# EAGLE board touch_glove_bullshit (EAGLE 7.7.0), part 1 of 2
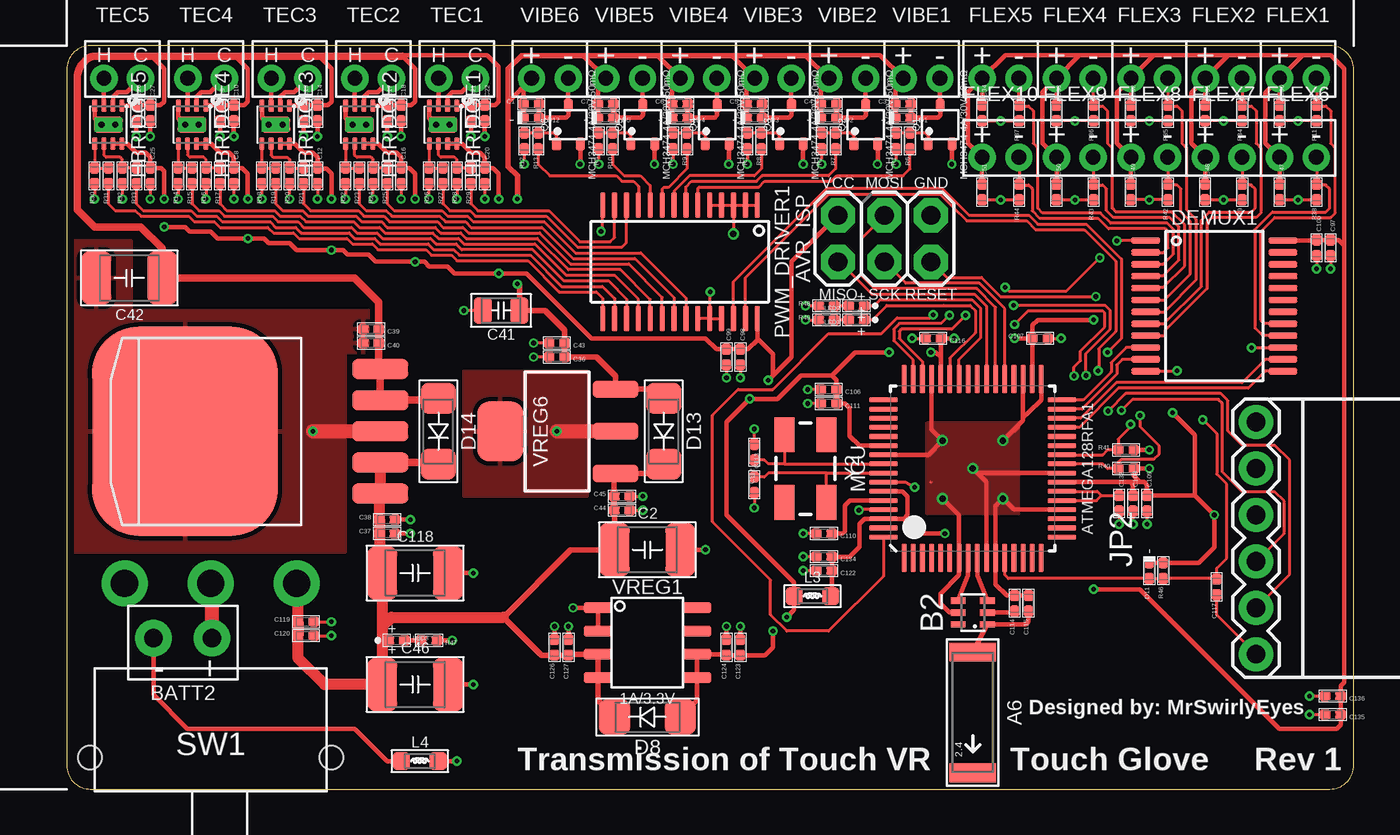
[diagram p0: board, top side]
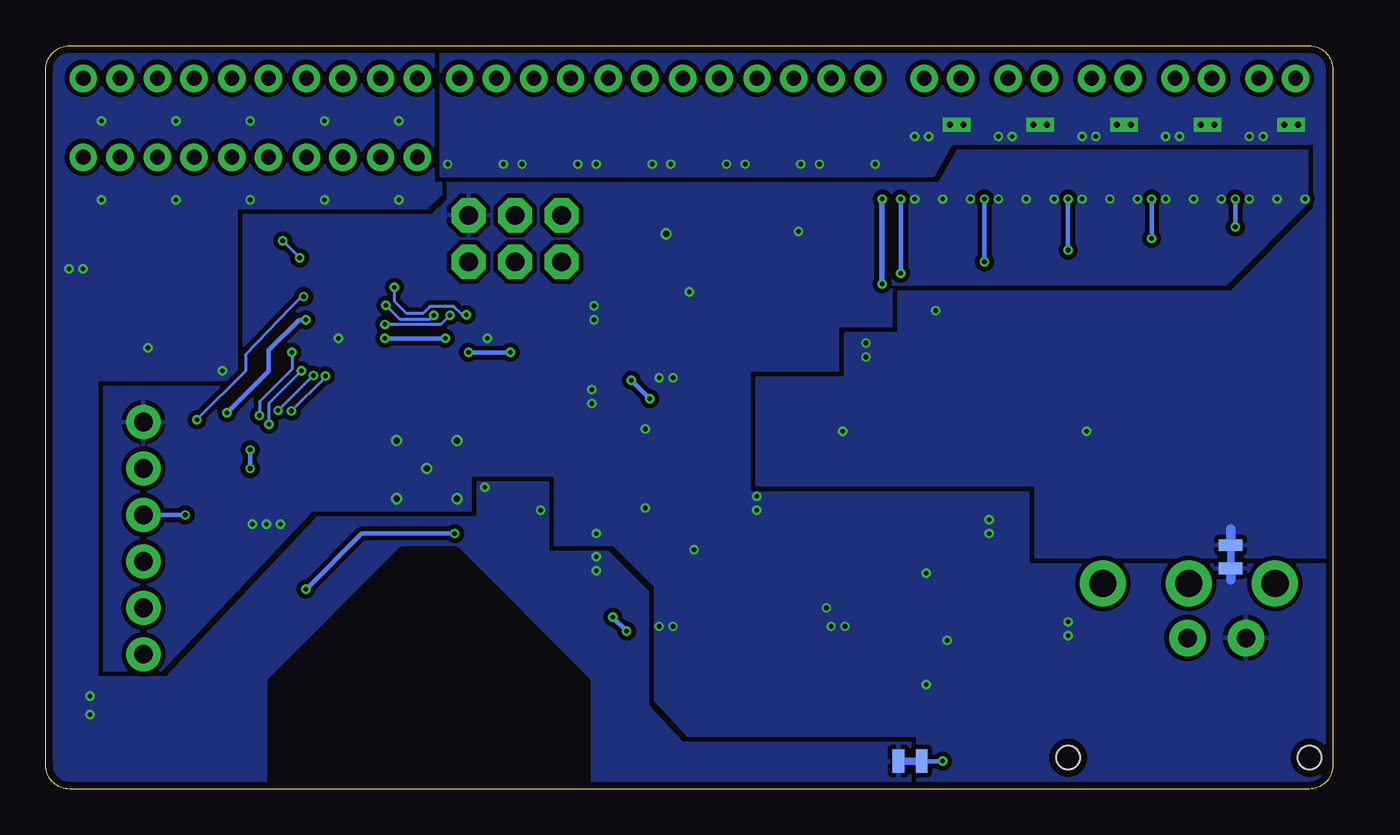
[diagram p1: board, bottom side, seen from below]

Size 70.36 x 40.64 mm. Coordinates in mm from the lower left corner, seen from the top.
Outline: 69.06,40.64 1.3,40.64 arc90 0,39.34 0,1.3 arc90 1.3,0 69.06,0 arc90 70.36,1.3 70.36,39.34 arc90 69.06,40.64
Copper layers (1*16): Top 0.035559375mm / dielectric 1.6mm / Bottom 0.035559375mm
Design rules "oshpark-2layer": minimum track width 6mil, minimum drill 10mil, track to track 6mil, track to pad 6mil, pad to pad 6mil, via to via 6mil, smd to smd 6mil, copper to edge 15mil, drill to drill 6mil, minimum pad ring 5mil, minimum via ring 5mil, stop-mask expansion 2.5mil, vias tented up to drill 0mil, thermal gap 10mil
bRestrict: area 40.9,0.5 to 57.9,13

## Footprints (pad centres in the part's own frame; a part is rotated, then mirrored left to right if it is on the bottom)
ANTENNA-CHIP5 = smd 1.016 x 2.54: FEED -3.302,0; NC 3.302,0
2PT_GND_TIE = smd 0.635 x 1.27: P$1 -0.635,0; P$2 0.635,0
2X3-NS = drill 1.016 pad 1.88 octagon: 1 -2.54,-1.27; 2 -2.54,1.27; 3 0,-1.27; 4 0,1.27; 5 2.54,-1.27; 6 2.54,1.27
0805_BALUN = smd 0.35 x 0.8: 1 -0.65,-0.8; 2 0,-0.8; 3 0.65,-0.8; 4 0.65,0.8; 5 0,0.8; 6 -0.65,0.8
DUAL_PTH_PADS = drill 1 pad 2: + -1.6,0; - 1.6,0
_CER_SMD_0402 = smd 0.6 x 0.55: 1 -0.425,0; 2 0.425,0
_CER_SMD-1210 = smd 1.65 x 2.9: 1 -1.8,0; 2 1.8,0
_CER_SMD-805 = smd 1 x 1.45: 1 -1,0; 2 1,0
SOD-923F/0402 = smd 0.6 x 0.55: A -0.425,0; K 0.425,0
SOD123F = smd 1.7 x 1.9: A -1.8,0; K 1.8,0
SSOP-24 = smd 1.6 x 0.35: 1 -3.75,3.575; 2 -3.75,2.925; 3 -3.75,2.275; 4 -3.75,1.625; 5 -3.75,0.975; 6 -3.75,0.325; 7 -3.75,-0.325; 8 -3.75,-0.975; 9 -3.75,-1.625; 10 -3.75,-2.275; 11 -3.75,-2.925; 12 -3.75,-3.575; 13 3.75,-3.575; 14 3.75,-2.925; 15 3.75,-2.275; 16 3.75,-1.625; 17 3.75,-0.975; 18 3.75,-0.325; 19 3.75,0.325; 20 3.75,0.975; 21 3.75,1.625; 22 3.75,2.275; 23 3.75,2.925; 24 3.75,3.575
CONNECTOR_FSR = drill 0.8 pad 1.5: + -1,-1.27; - 1,-1.27
WSON-8-PPAD = smd 0.7 x 0.28: 1 -1.035,0.75; 2 -1.035,0.25; 3 -1.035,-0.25; 4 -1.035,-0.75; 5 1.035,-0.75; 6 1.035,-0.25; 7 1.035,0.25; 8 1.035,0.75 | smd 0.9 x 1.6: GND 0,0 | drill 0.33 pad 0.75 square: P$1 0,-0.38; P$2 0,0.37
FTDI_BASIC-6PIN-MALE-RA = drill 1.016 pad 1.88: CTS 10.16,0; DTR 0,0; GND 12.7,0; RXI 2.54,0; TXO 5.08,0; VCC 7.62,0
_SMD-0603 = smd 0.95 x 1: 1 -1,0; 2 1,0
LED_SMD-0402 = smd 0.6 x 0.55: A -0.425,0; K 0.425,0
VFQFN-64 = smd 1.562 x 0.28: 1 -4.881,3.75; 2 -4.881,3.25; 3 -4.881,2.75; 4 -4.881,2.25; 5 -4.881,1.75; 6 -4.881,1.25; 7 -4.881,0.75; 8 -4.881,0.25; 9 -4.881,-0.25; 10 -4.881,-0.75; 11 -4.881,-1.25; 12 -4.881,-1.75; 13 -4.881,-2.25; 14 -4.881,-2.75; 15 -4.881,-3.25; 16 -4.881,-3.75; 33 4.881,-3.75; 34 4.881,-3.25; 35 4.881,-2.75; 36 4.881,-2.25; 37 4.881,-1.75; 38 4.881,-1.25; 39 4.881,-0.75; 40 4.881,-0.25; 41 4.881,0.25; 42 4.881,0.75; 43 4.881,1.25; 44 4.881,1.75; 45 4.881,2.25; 46 4.881,2.75; 47 4.881,3.25; 48 4.881,3.75 | smd 0.28 x 1.562: 17 -3.75,-4.881; 18 -3.25,-4.881; 19 -2.75,-4.881; 20 -2.25,-4.881; 21 -1.75,-4.881; 22 -1.25,-4.881; 23 -0.75,-4.881; 24 -0.25,-4.881; 25 0.25,-4.881; 26 0.75,-4.881; 27 1.25,-4.881; 28 1.75,-4.881; 29 2.25,-4.881; 30 2.75,-4.881; 31 3.25,-4.881; 32 3.75,-4.881; 49 3.75,4.881; 50 3.25,4.881; 51 2.75,4.881; 52 2.25,4.881; 53 1.75,4.881; 54 1.25,4.881; 55 0.75,4.881; 56 0.25,4.881; 57 -0.25,4.881; 58 -0.75,4.881; 59 -1.25,4.881; 60 -1.75,4.881; 61 -2.25,4.881; 62 -2.75,4.881; 63 -3.25,4.881; 64 -3.75,4.881
TSSOP-28 = smd 1.4 x 0.3: 1 -3.1,4.225; 2 -3.1,3.575; 3 -3.1,2.925; 4 -3.1,2.275; 5 -3.1,1.625; 6 -3.1,0.975; 7 -3.1,0.325; 8 -3.1,-0.325; 9 -3.1,-0.975; 10 -3.1,-1.625; 11 -3.1,-2.275; 12 -3.1,-2.925; 13 -3.1,-3.575; 14 -3.1,-4.225; 15 3.1,-4.225; 16 3.1,-3.575; 17 3.1,-2.925; 18 3.1,-2.275; 19 3.1,-1.625; 20 3.1,-0.975; 21 3.1,-0.325; 22 3.1,0.325; 23 3.1,0.975; 24 3.1,1.625; 25 3.1,2.275; 26 3.1,2.925; 27 3.1,3.575; 28 3.1,4.225
SC-70FL/MCPH3 = smd 0.5 x 0.7: 1 -0.65,-1.05; 2 0.65,-1.05; 3 0,1.05
RESISTOR_SMD-0402 = smd 0.6 x 0.55: 1 -0.425,0; 2 0.425,0
SW_SLIDE_RA_SPDT_4A-28V_L12.7-W9.5 = drill 1.5 pad 2.5: P 0,-4.765; S1 -4.7,-4.765; S2 4.7,-4.765 | hole 1.3: -6.605,4.765; 6.605,4.765
CONNECTOR_PELTIER = drill 0.8 pad 1.5: COLD 1,-1.27; HOT -1,-1.27
CONNECTOR_VIBE-MOTOR = drill 0.8 pad 1.5: 1 -1,-1.27; 2 1,-1.27
SOIC-8_W3.9MM = smd 1.55 x 0.6: 1 -2.7,1.905; 2 -2.7,0.635; 3 -2.7,-0.635; 4 -2.7,-1.905; 5 2.7,-1.905; 6 2.7,-0.635; 7 2.7,0.635; 8 2.7,1.905
SOT223-4 = smd 0.95 x 2.5: 1 -2.3,-3.199; 2 0,-3.199; 3 2.3,-3.199 | smd 3.25 x 2.5: TAB 0,3.099
DDPAK-5 = smd 1.067 x 3.048: 1 -3.404,-8.763; 2 -1.702,-8.763; 3 0,-8.763; 4 1.702,-8.763; 5 3.404,-8.763 | smd 11.43 x 10.16: TAB 0,1.905
CRYSTAL-SMD-5X3 = smd 1.9 x 1.1: 1 -1.85,-1.15; 2 1.85,-1.15; 3 1.85,1.15; 4 -1.85,1.15

## Placement (x,y rotation side)
A6  2.4GHz/802.11/0.5dBi/3W  [ANTENNA-CHIP5]  49.53,4.19 270 top
ANALOG_BR  2PT_GND_TIE  [2PT_GND_TIE]  23.11,1.52 180 bottom
AVR_ISP  AVR ISP  [2X3-NS]  44.7,30.1 0 top
B2  Impedence UNBAL/BAL (50Ω/100Ω)  [0805_BALUN]  49.53,9.65 90 top
BATT2  BATTERYPTH_HOLES  [DUAL_PTH_PADS]  6.35,8.26 180 top
C1  0.1uF/50V  [_CER_SMD_0402]  25.4,37.47 0 top
C2  100uF/16V  [_CER_SMD-1210]  31.75,13.08 0 top
C3  0.1uF/50V  [_CER_SMD_0402]  45.72,37.47 0 top
C4  0.1uF/50V  [_CER_SMD_0402]  41.66,37.47 0 top
C5  0.1uF/50V  [_CER_SMD_0402]  37.59,37.47 0 top
C6  0.1uF/50V  [_CER_SMD_0402]  33.53,37.47 0 top
C7  0.1uF/50V  [_CER_SMD_0402]  29.46,37.47 0 top
C8  0.1uF/50V  [_CER_SMD_0402]  9.14,33.53 270 top
C9  0.1uF/50V  [_CER_SMD_0402]  8.38,36.96 270 top
C10  10uF/10V  [_CER_SMD_0402]  9.14,36.96 270 top
C12  0.1uF/50V  [_CER_SMD_0402]  13.72,33.53 270 top
C13  0.1uF/50V  [_CER_SMD_0402]  12.95,36.96 270 top
C14  10uF/10V  [_CER_SMD_0402]  13.72,36.96 270 top
C16  0.1uF/50V  [_CER_SMD_0402]  18.29,33.53 270 top
C17  0.1uF/50V  [_CER_SMD_0402]  17.53,36.96 270 top
C18  10uF/10V  [_CER_SMD_0402]  18.29,36.96 270 top
C20  0.1uF/50V  [_CER_SMD_0402]  22.86,33.53 270 top
C21  0.1uF/50V  [_CER_SMD_0402]  22.1,36.96 270 top
C22  10uF/10V  [_CER_SMD_0402]  22.86,36.96 270 top
C25  0.1uF/50V  [_CER_SMD_0402]  4.57,33.53 270 top
C26  0.1uF/50V  [_CER_SMD_0402]  3.81,36.96 270 top
C27  10uF/10V  [_CER_SMD_0402]  4.57,36.96 270 top
C30  0.1uF/50V  [_CER_SMD_0402]  66.29,36.96 270 top
C31  0.1uF/50V  [_CER_SMD_0402]  62.23,36.96 270 top
C32  0.1uF/50V  [_CER_SMD_0402]  58.17,36.96 270 top
C33  0.1uF/50V  [_CER_SMD_0402]  54.1,36.96 270 top
C34  0.1uF/50V  [_CER_SMD_0402]  50.04,36.96 270 top
C36  0.1uF/50V  [_CER_SMD_0402]  26.8,23.62 180 top
C37  10uF/10V  [_CER_SMD_0402]  17.53,13.97 0 top
C38  0.1uF/50V  [_CER_SMD_0402]  17.53,14.73 0 top
C39  10uF/10V  [_CER_SMD_0402]  16.64,25.15 180 top
C40  0.1uF/50V  [_CER_SMD_0402]  16.64,24.38 180 top
C41  47uF/10V  [_CER_SMD-805]  23.75,26.16 180 top
C42  100uF/16V  [_CER_SMD-1210]  3.43,27.94 180 top
C43  10uF/10V  [_CER_SMD_0402]  26.8,24.38 180 top
C44  10uF/10V  [_CER_SMD_0402]  30.35,15.24 0 top
C45  0.1uF/50V  [_CER_SMD_0402]  30.35,16 0 top
C46  100uF/16V  [_CER_SMD-1210]  19.05,5.71 0 top
C47  0.1uF/50V  [_CER_SMD_0402]  66.29,32.64 270 top
C48  0.1uF/50V  [_CER_SMD_0402]  62.23,32.64 270 top
C49  0.1uF/50V  [_CER_SMD_0402]  58.17,32.64 270 top
C50  0.1uF/50V  [_CER_SMD_0402]  54.1,32.64 270 top
C51  0.1uF/50V  [_CER_SMD_0402]  50.04,32.64 270 top
C97  10uF/10V  [_CER_SMD_0402]  69.09,29.59 270 top
C98  0.1uF/50V  [_CER_SMD_0402]  36.83,23.62 270 top
C99  10uF/10V  [_CER_SMD_0402]  36.07,23.62 270 top
C100  0.1uF/50V  [_CER_SMD_0402]  68.33,29.59 270 top
C106  0.1uF/50V  [_CER_SMD_0402]  41.66,21.84 180 top
C107  1uF/25V  [_CER_SMD_0402]  53.21,24.64 0 top
C108  0.1uF/50V  [_CER_SMD_0402]  58.29,15.62 270 top
C109  1uF/25V  [_CER_SMD_0402]  59.05,15.62 270 top
C110  1uF/25V  [_CER_SMD_0402]  41.4,13.97 180 top
C111  1uF/25V  [_CER_SMD_0402]  41.66,21.08 180 top
C112  12pF/100V  [_CER_SMD_0402]  37.59,18.41 90 top
C113  12pF/100V  [_CER_SMD_0402]  37.59,16.64 270 top
C114  22pF/50V  [_CER_SMD_0402]  51.82,10.16 90 top
C115  0.75pF/50V  [_CER_SMD_0402]  52.58,10.16 90 top
C116  0.1uF/50V  [_CER_SMD_0402]  47.37,24.64 180 top
C117  0.1uF/50V  [_CER_SMD_0402]  62.87,11.05 90 top
C118  100uF/16V  [_CER_SMD-1210]  19.05,11.81 0 top
C119  0.1uF/50V  [_CER_SMD_0402]  13.08,9.14 0 top
C120  10uF/10V  [_CER_SMD_0402]  13.08,8.38 0 top
C122  0.1uF/50V  [_CER_SMD_0402]  41.4,11.94 180 top
C123  10uF/10V  [_CER_SMD_0402]  36.83,7.75 90 top
C124  0.1uF/50V  [_CER_SMD_0402]  36.07,7.75 90 top
C126  10uF/10V  [_CER_SMD_0402]  26.67,7.75 90 top
C127  0.1uF/50V  [_CER_SMD_0402]  27.43,7.75 90 top
C132  1uF/25V  [_CER_SMD_0402]  57.53,15.62 270 top
C134  1uF/25V  [_CER_SMD_0402]  41.4,12.7 180 top
C135  0.1uF/50V  [_CER_SMD_0402]  69.22,4.06 180 top
C136  1uF/25V  [_CER_SMD_0402]  69.22,5.08 180 top
D1  150mA/75V  [SOD-923F/0402]  45.72,36.7 180 top
D2  150mA/75V  [SOD-923F/0402]  41.66,36.7 180 top
D3  150mA/75V  [SOD-923F/0402]  37.59,36.7 180 top
D4  150mA/75V  [SOD-923F/0402]  33.53,36.7 180 top
D5  150mA/75V  [SOD-923F/0402]  29.46,36.7 180 top
D8  1A/50V  [SOD123F]  31.75,3.94 180 top
D11  150mA/75V  [SOD-923F/0402]  59.18,11.94 90 top
D12  150mA/75V  [SOD-923F/0402]  25.4,36.7 180 top
D13  1A/50V  [SOD123F]  32.64,19.56 270 top
D14  1A/50V  [SOD123F]  20.32,19.56 270 top
DEMUX1  CH16_MUX-DEMUX  [SSOP-24]  62.74,26.42 0 top
FLEX1  10K  [CONNECTOR_FSR]  67.31,40.13 0 top
FLEX2  10K  [CONNECTOR_FSR]  63.25,40.13 0 top
FLEX3  10K  [CONNECTOR_FSR]  59.18,40.13 0 top
FLEX4  10K  [CONNECTOR_FSR]  55.12,40.13 0 top
FLEX5  10K  [CONNECTOR_FSR]  51.05,40.13 0 top
FLEX6  10K  [CONNECTOR_FSR]  67.31,35.81 0 top
FLEX7  10K  [CONNECTOR_FSR]  63.25,35.81 0 top
FLEX8  10K  [CONNECTOR_FSR]  59.18,35.81 0 top
FLEX9  10K  [CONNECTOR_FSR]  55.12,35.81 0 top
FLEX10  10K  [CONNECTOR_FSR]  51.05,35.81 0 top
HBRIDGE1  DRV8837C  [WSON-8-PPAD]  20.57,36.32 270 top
HBRIDGE2  DRV8837C  [WSON-8-PPAD]  16,36.32 270 top
HBRIDGE3  DRV8837C  [WSON-8-PPAD]  11.43,36.32 270 top
HBRIDGE4  DRV8837C  [WSON-8-PPAD]  6.86,36.32 270 top
HBRIDGE5  DRV8837C  [WSON-8-PPAD]  2.29,36.32 270 top
JP2  FTDIPTH-RA  [FTDI_BASIC-6PIN-MALE-RA]  65.02,7.37 90 top
L3  10uH/0.38A  [_SMD-0603]  40.77,10.54 0 top
L4  10uH/0.38A  [_SMD-0603]  19.3,1.52 0 top
LED1  GREEN  [LED_SMD-0402]  43.18,25.65 180 top
LED2  RED  [LED_SMD-0402]  43.18,26.42 180 top
LED3  BLUE  [LED_SMD-0402]  18.03,8.13 0 top
MCU  ATMEGA128RFA1  [VFQFN-64]  49.53,17.53 90 top
NOISE_BR  2PT_GND_TIE  [2PT_GND_TIE]  5.59,12.7 270 bottom
PWM_DRIVER1  PCA9685  [TSSOP-28]  33.53,28.83 270 top
Q1  MCH3474 4A/30V/50mΩ  [SC-70FL/MCPH3]  47.75,36.32 0 top
Q2  MCH3474 4A/30V/50mΩ  [SC-70FL/MCPH3]  43.69,36.32 0 top
Q3  MCH3474 4A/30V/50mΩ  [SC-70FL/MCPH3]  39.62,36.32 0 top
Q4  MCH3474 4A/30V/50mΩ  [SC-70FL/MCPH3]  35.56,36.32 0 top
Q5  MCH3474 4A/30V/50mΩ  [SC-70FL/MCPH3]  31.5,36.32 0 top
Q6  MCH3474 4A/30V/50mΩ  [SC-70FL/MCPH3]  27.43,36.32 0 top
R1  10KΩ  [RESISTOR_SMD-0402]  45.34,35.43 90 top
R2  10KΩ  [RESISTOR_SMD-0402]  41.27,35.43 90 top
R3  10KΩ  [RESISTOR_SMD-0402]  37.21,35.43 90 top
R4  10KΩ  [RESISTOR_SMD-0402]  33.15,35.43 90 top
R5  10KΩ  [RESISTOR_SMD-0402]  29.08,35.43 90 top
R6  100Ω  [RESISTOR_SMD-0402]  46.1,35.43 90 top
R7  100Ω  [RESISTOR_SMD-0402]  42.04,35.43 90 top
R8  100Ω  [RESISTOR_SMD-0402]  37.97,35.43 90 top
R9  100Ω  [RESISTOR_SMD-0402]  33.91,35.43 90 top
R10  100Ω  [RESISTOR_SMD-0402]  29.84,35.43 90 top
R11  47KΩ  [RESISTOR_SMD-0402]  68.33,36.96 90 top
R12  10KΩ  [RESISTOR_SMD-0402]  25.02,35.43 90 top
R13  100Ω  [RESISTOR_SMD-0402]  25.78,35.43 90 top
R14  10KΩ  [RESISTOR_SMD-0402]  6.1,33.53 90 top
R15  100Ω  [RESISTOR_SMD-0402]  6.86,33.53 90 top
R16  10KΩ  [RESISTOR_SMD-0402]  7.62,33.53 90 top
R17  100Ω  [RESISTOR_SMD-0402]  8.38,33.53 90 top
R18  10KΩ  [RESISTOR_SMD-0402]  10.67,33.53 90 top
R19  100Ω  [RESISTOR_SMD-0402]  11.43,33.53 90 top
R20  10KΩ  [RESISTOR_SMD-0402]  12.19,33.53 90 top
R21  100Ω  [RESISTOR_SMD-0402]  12.95,33.53 90 top
R22  10KΩ  [RESISTOR_SMD-0402]  15.24,33.53 90 top
R23  100Ω  [RESISTOR_SMD-0402]  16,33.53 90 top
R24  10KΩ  [RESISTOR_SMD-0402]  16.76,33.53 90 top
R25  100Ω  [RESISTOR_SMD-0402]  17.53,33.53 90 top
R26  10KΩ  [RESISTOR_SMD-0402]  19.81,33.53 90 top
R27  100Ω  [RESISTOR_SMD-0402]  20.57,33.53 90 top
R28  10KΩ  [RESISTOR_SMD-0402]  21.34,33.53 90 top
R29  100Ω  [RESISTOR_SMD-0402]  22.1,33.53 90 top
R30  10KΩ  [RESISTOR_SMD-0402]  1.52,33.53 90 top
R31  100Ω  [RESISTOR_SMD-0402]  2.29,33.53 90 top
R32  10KΩ  [RESISTOR_SMD-0402]  3.05,33.53 90 top
R33  100Ω  [RESISTOR_SMD-0402]  3.81,33.53 90 top
R34  47KΩ  [RESISTOR_SMD-0402]  64.26,36.96 90 top
R35  47KΩ  [RESISTOR_SMD-0402]  60.2,36.96 90 top
R36  47KΩ  [RESISTOR_SMD-0402]  56.13,36.96 90 top
R37  47KΩ  [RESISTOR_SMD-0402]  52.07,36.96 90 top
R38  47KΩ  [RESISTOR_SMD-0402]  68.33,32.64 90 top
R39  47KΩ  [RESISTOR_SMD-0402]  64.26,32.64 90 top
R40  4.7KΩ  [RESISTOR_SMD-0402]  57.91,17.53 0 top
R41  4.7KΩ  [RESISTOR_SMD-0402]  57.91,18.54 0 top
R42  47KΩ  [RESISTOR_SMD-0402]  60.2,32.64 90 top
R43  47KΩ  [RESISTOR_SMD-0402]  56.13,32.64 90 top
R44  47KΩ  [RESISTOR_SMD-0402]  52.07,32.64 90 top
R46  10KΩ  [RESISTOR_SMD-0402]  59.94,11.94 90 top
R47  10KΩ  [RESISTOR_SMD-0402]  19.81,8.13 180 top
R48  2KΩ  [RESISTOR_SMD-0402]  41.53,26.42 0 top
R49  1KΩ  [RESISTOR_SMD-0402]  41.53,25.65 0 top
SW1  4A/28V  [SW_SLIDE_RA_SPDT_4A-28V_L12.7-W9.5]  7.87,6.48 180 top
TEC1  PELTIER  [CONNECTOR_PELTIER]  21.34,40.13 0 top
TEC2  PELTIER  [CONNECTOR_PELTIER]  16.76,40.13 0 top
TEC3  PELTIER  [CONNECTOR_PELTIER]  12.19,40.13 0 top
TEC4  PELTIER  [CONNECTOR_PELTIER]  7.62,40.13 0 top
TEC5  PELTIER  [CONNECTOR_PELTIER]  3.05,40.13 0 top
VIBE1  VIBE_MOTOR  [CONNECTOR_VIBE-MOTOR]  46.74,40.13 0 top
VIBE2  VIBE_MOTOR  [CONNECTOR_VIBE-MOTOR]  42.67,40.13 0 top
VIBE3  VIBE_MOTOR  [CONNECTOR_VIBE-MOTOR]  38.61,40.13 0 top
VIBE4  VIBE_MOTOR  [CONNECTOR_VIBE-MOTOR]  34.54,40.13 0 top
VIBE5  VIBE_MOTOR  [CONNECTOR_VIBE-MOTOR]  30.48,40.13 0 top
VIBE6  VIBE_MOTOR  [CONNECTOR_VIBE-MOTOR]  26.42,40.13 0 top
VREG1  1A/3.3V  [SOIC-8_W3.9MM]  31.75,8 0 top
VREG6  TL1963A-33 1.5A/3.3V  [SOT223-4]  26.8,19.56 90 top
VREG7  3A/1.8V  [DDPAK-5]  8.38,19.56 90 top
Y2  16MHz  [CRYSTAL-SMD-5X3]  40.39,17.53 270 top

## Library data of the parts
A6 = PiB_radio_frequency; CREATOR: Kenmei; DATASHEET: http://www.linxtechnologies.com/resources/data-guides/ant-xxx-chp-x.pdf; DIST: Digikey; DISTLINK: https://www.digikey.com/products/en?keywords=ANT-2.45-CHPCT-ND; DISTPN: ANT-2.45-CHPCT-ND; MFR: Linx Technologies Inc.; MPN: ANT-2.45-CHP-T
ANALOG_BR NOISE_BR = PiB_power_symbols
AVR_ISP = PiB_connectors; DATASHEET: http://portal.fciconnect.com/Comergent//fci/drawing/67996.pdf; DIST: Digikey; DISTLINK: https://www.digikey.com/products/en?keywords=609-3234-ND; DISTPN: 609-3234-ND; MFR: Amphenol FCI; MPN: 67997-206HLF
B2 = PiB_radio_frequency; CREATOR: Kenmei; DATASHEET: http://katalog.we-online.de/pbs/datasheet/748421245.pdf; DIST: Digikey; DISTLINK: https://www.digikey.com/products/en?keywords=732-2230-6-ND; DISTPN: 732-2230-6-ND; MFR: Wurth Electronics Inc; MPN: 748421245
BATT2 = PiB
C1 C3-C9 C12 C13 C16 C17 C20 C21 C25 C26 C30-C34 C36 C38 C40 C45 C47-C51 C98 C100 C106 C108 C116 C117 C119 C122 C124 C127 C135 = PiB_capacitors; CREATOR: MrSwirlyEyes; DIST: Digikey; DISTLINK: https://www.digikey.com/products/en?keywords=490-11917-1-ND; DISTPN: 490-11917-1-ND; MFR: Murata Electronics North America; MPN: GRM155R61H104KE19D
C2 C42 C46 C118 = PiB_capacitors; CREATOR: MrSwirlyEyes; DATASHEET: http://www.yuden.co.jp/productdata/catalog/en/mlcc01_e.pdf; DIST: Digikey; DISTLINK: https://www.digikey.com/products/en?keywords=587-3152-1-ND; DISTPN: 587-3152-1-ND; MFR: Taiyo Yuden; MPN: EMK325ABJ107MM-T
C10 C14 C18 C22 C27 C37 C39 C43 C44 C97 C99 C120 C123 C126 = PiB_capacitors; CREATOR: MrSwirlyEyes; DATASHEET: http://www.samsungsem.com/kr/support/product-search/mlcc/__icsFiles/afieldfile/2017/07/28/S_CL05A106MP5NUNC.pdf; DIST: Digikey; DISTLINK: https://www.digikey.com/products/en?keywords=1276-1450-1-ND; DISTPN: 1276-1450-1-ND; MFR: Samsung Electro-Mechanics; MPN: CL05A106MP5NUNC
C41 = PiB_capacitors; CREATOR: MrSwirlyEyes; DATASHEET: http://search.murata.co.jp/Ceramy/image/img/A01X/G101/ENG/GRM21BR61A476ME15-01.pdf; DIST: Digikey; DISTLINK: https://www.digikey.com/products/en?keywords=490-9961-1-ND; DISTPN: 490-9961-1-ND; MFR: Murata Electronics North America; MPN: GRM21BR61A476ME15L
C107 C109-C111 C132 C134 C136 = PiB_capacitors; CREATOR: MrSwirlyEyes; DATASHEET: http://search.murata.co.jp/Ceramy/image/img/A01X/G101/ENG/GRM155C81E105KE11-01.pdf; DIST: Digikey; DISTLINK: https://www.digikey.com/products/en?keywords=490-10014-1-ND; DISTPN: 490-10014-1-ND; MFR: Murata Electronics North America; MPN: GRM155C81E105KE11D
C112 C113 = PiB_capacitors; CREATOR: MrSwirlyEyes; DATASHEET: http://search.murata.co.jp/Ceramy/image/img/A01X/G101/ENG/GRM1555C2A120JA01-01.pdf; DIST: Digikey; DISTLINK: https://www.digikey.com/products/en?keywords=490-7300-1-ND; DISTPN: 490-7300-1-ND; MFR: Murata Electronics North America; MPN: GRM1555C2A120JA01D
C114 = PiB_capacitors; CREATOR: MrSwirlyEyes; DATASHEET: http://search.murata.co.jp/Ceramy/image/img/A01X/G101/ENG/GRM1555C1H220JA01-01.pdf; DIST: Digikey; DISTLINK: https://www.digikey.com/products/en?keywords=490-5868-1-ND; DISTPN: 490-5868-1-ND; MFR: Murata Electronics North America; MPN: GRM1555C1H220JA01D
C115 = PiB_capacitors; CREATOR: MrSwirlyEyes; DATASHEET: https://www.murata.com/~/media/webrenewal/support/library/catalog/products/capacitor/mlcc/c02e.ashx?la=en-us; DIST: Digikey; DISTLINK: https://www.digikey.com/products/en?keywords=490-5960-1-ND; DISTPN: 490-5960-1-ND; MFR: Murata Electronics North America; MPN: GRM1555C1HR75CA01D
D1-D5 D11 D12 = PiB_discrete_semiconductors; CREATOR: MrSwirlyEyes; DATASHEET: http://www.comchiptech.com/cms/UserFiles/CDSQR4148-HF-RevC213424.pdf; DIST: Digikey; DISTLINK: https://www.digikey.com/products/en?keywords=641-1677-1-ND; DISTPN: 641-1677-1-ND; MFR: Comchip Technology; MPN: CDSQR4148-HF
D8 D13 D14 = PiB_discrete_semiconductors; CREATOR: MrSwirlyEyes; DATASHEET: http://www.comchiptech.com/cms/UserFiles/CGRKM4001-HF%20Thru.%20CGRKM4007-HF%20RevG.pdf; DIST: Digikey; DISTLINK: https://www.digikey.com/products/en?keywords=641-1511-1-ND; DISTPN: 641-1511-1-ND; MFR: Comchip Technology; MPN: CGRKM4001-HF; TESTED: NO
DEMUX1 = PiB; CREATOR: MrSwirlyEyes; DATASHEET: http://www.ti.com/lit/ds/symlink/cd74hc4067.pdf; DIST: Digikey; DISTLINK: https://www.digikey.com/products/en?keywords=296-9226-1-ND; DISTPN: 296-9226-1-ND; MFR: Texas Instruments; MPN: CD74HC4067SM96; TESTED: NO
FLEX1-FLEX10 = PiB; CREATOR: MrSwirlyEyes; DATASHEET: https://cdn.sparkfun.com/datasheets/Sensors/ForceFlex/FLEX%20SENSOR%20DATA%20SHEET%202014.pdf; DIST: Sparkfun; DISTLINK: https://www.sparkfun.com/products/10264; DISTPN: SEN-10264; MFR: Spectra Symbol; MPN: FS-L-0055-103-ST?
HBRIDGE1-HBRIDGE5 = PiB; CREATOR: MrSwirlyEyes; DATASHEET: http://www.ti.com/lit/ds/symlink/drv8837c.pdf; DIST: Digikey; DISTLINK: https://www.digikey.com/products/en?keywords=296-44747-1-ND; DISTPN: 296-44747-1-ND; MFR: Texas Instruments; MPN: DRV8837CDSGT; TESTED: NO
JP2 = PiB_connectors; DATASHEET: http://portal.fciconnect.com/Comergent//fci/drawing/68015.pdf; DIST: Digikey; DISTLINK: https://www.digikey.com/products/en?keywords=609-3327-ND; DISTPN: 609-3327-ND; MFR: Amphenol FCI; MPN: 68016-406HLF; PRICE: 0.33
L3 L4 = PiB_inductors; CREATOR: MrSwirlyEyes; DATASHEET: http://ds.yuden.co.jp/TYCOMPAS/ut/detail.do?productNo=CBMF1608T100K&fileName=CBMF1608T100K_SS&mode=specSheetDownload; DIST: Digikey; DISTLINK: https://www.digikey.com/products/en?keywords=587-1720-1-ND; DISTPN: 587-1720-1-ND; MFR: Taiyo Yuden; MPN: CBMF1608T100K
LED1 = PiB_leds; CREATOR: MrSwirlyEyes; DATASHEET: https://www.bivar.com/portals/0/products/SM0402GC.pdf; DIST: Digikey; DISTLINK: https://www.digikey.com/products/en?keywords=492-2205-1-ND; DISTPN: 492-2205-1-ND; MFR: Bivar Inc.; MPN: SM0402GC
LED2 = PiB_leds; CREATOR: MrSwirlyEyes; DATASHEET: https://www.bivar.com/portals/0/products/SM0402RC.pdf; DIST: Digikey; DISTLINK: https://www.digikey.com/products/en?keywords=492-2208-1-ND; DISTPN: 492-2208-1-ND; MFR: Bivar Inc.; MPN: SM0402RC
LED3 = PiB_leds; CREATOR: MrSwirlyEyes; DATASHEET: https://www.bivar.com/portals/0/products/SM0402BWC.pdf; DIST: Digikey; DISTLINK: https://www.digikey.com/products/en?keywords=492-2203-1-ND; DISTPN: 492-2203-1-ND; MFR: Bivar Inc.; MPN: SM0402BWC
MCU = PiB_ic_microcontrollers; CREATOR: Kenmei; DATASHEET: http://www.atmel.com/Images/Atmel-8266-MCU_Wireless-ATmega128RFA1_Datasheet.pdf; DIST: Digikey; DISTLINK: https://www.digikey.com/products/en?mpart=ATMEGA128RFA1-ZU; DISTPN: ATMEGA128RFA1-ZU-ND; MFR: Atmel; MPN: ATMEGA128RFA1-ZU; TESTED: YES
PWM_DRIVER1 = PiB; CREATOR: MrSwirlyEyes; DATASHEET: http://www.nxp.com/docs/en/data-sheet/PCA9685.pdf; DIST: Digikey; DISTLINK: https://www.digikey.com/products/en?keywords=568-11925-1-ND; DISTPN: 568-11925-1-ND; MFR: NXP USA Inc.; MPN: PCA9685PW,118
Q1-Q6 = PiB_discrete_semiconductors; CREATOR: Kenmei; DATASHEET: https://media.digikey.com/pdf/Data%20Sheets/ON%20Semiconductor%20PDFs/MCH3474.pdf; DIST: Digikey; DISTLINK: https://www.digikey.com/products/en?keywords=MCH3474-TL-WOSCT; DISTPN: MCH3474-TL-WOSCT-ND; MFR: ON Semiconductor; MPN: MCH3474-TL-W; TESTED: No
R1-R5 R12 R14 R16 R18 R20 R22 R24 R26 R28 R30 R32 R46 R47 = PiB_resistors; CREATOR: MrSwirlyEyes; DATASHEET: http://www.yageo.com/documents/recent/PYu-RC_Group_51_RoHS_L_8.pdf; DIST: Digikey; DISTLINK: https://www.digikey.com/products/en?keywords=311-10KJRCT-ND; DISTPN: 311-10KJRCT-ND; MFR: Yageo; MPN: RC0402JR-0710KL
R6-R10 R13 R15 R17 R19 R21 R23 R25 R27 R29 R31 R33 = PiB_resistors; CREATOR: MrSwirlyEyes; DATASHEET: http://www.yageo.com/documents/recent/PYu-RC_Group_51_RoHS_L_8.pdf; DIST: Digikey; DISTLINK: https://www.digikey.com/products/en?keywords=311-100JRCT-ND; DISTPN: 311-100JRCT-ND; MFR: Yageo; MPN: RC0402JR-07100RL
R11 R34-R39 R42-R44 = PiB_resistors; CREATOR: MrSwirlyEyes; DATASHEET: http://www.yageo.com/documents/recent/PYu-RC_Group_51_RoHS_L_8.pdf; DIST: Digikey; DISTLINK: https://www.digikey.com/products/en?keywords=311-47KJRCT-ND; DISTPN: 311-47KJRCT-ND; MFR: Yageo; MPN: RC0402JR-0747KL
R40 R41 = PiB_resistors; CREATOR: MrSwirlyEyes; DATASHEET: http://www.yageo.com/documents/recent/PYu-RC_Group_51_RoHS_L_8.pdf; DIST: Digikey; DISTLINK: https://www.digikey.com/products/en?keywords=311-4.7KJRCT-ND; DISTPN: 311-4.7KJRCT-ND; MFR: Yageo; MPN: RC0402JR-074K7L
R48 = PiB_resistors; CREATOR: MrSwirlyEyes; DATASHEET: http://www.yageo.com/documents/recent/PYu-RC_Group_51_RoHS_L_8.pdf; DIST: Digikey; DISTLINK: https://www.digikey.com/products/en?keywords=311-2.0KJRCT-ND; DISTPN: 311-2.0KJRCT-ND; MFR: Yageo; MPN: RC0402JR-072KL
R49 = PiB_resistors; CREATOR: MrSwirlyEyes; DATASHEET: http://www.yageo.com/documents/recent/PYu-RC_Group_51_RoHS_L_8.pdf; DIST: Digikey; DISTLINK: https://www.digikey.com/products/en?keywords=311-1.0KJRCT-ND; DISTPN: 311-1.0KJRCT-ND; MFR: Yageo; MPN: RC0402JR-071KL
SW1 = PiB_switches; CREATOR: MrSwirlyEyes; DATASHEET: http://spec_sheets.e-switch.com/specs/T511006.pdf; DIST: Digikey; DISTLINK: https://www.digikey.com/products/en?keywords=EG2478-ND; DISTPN: EG2478-ND; MFR: E-Switch; MPN: 500SSP1S1M6QEA
TEC1-TEC5 = PiB; CREATOR: MrSwirlyEyes; DATASHEET: http://www.marlow.com/downloads/dl/file/id/212/product/25/nl1025t.pdf; DIST: Digikey; DISTLINK: https://www.digikey.com/products/en?keywords=1681-1032-ND; DISTPN: 1681-1032-ND; MFR: Marlow Industries, Inc.; MPN: NL1025T-01AC; TESTED: NO
VIBE1-VIBE6 = PiB; CREATOR: MrSwirlyEyes; DATASHEET: http://www.vibration-motor.com/products/download/C0825B002F.pdf; DIST: Digikey; DISTLINK: https://www.digikey.com/products/en?keywords=1670-1002-ND; DISTPN: 1670-1002-ND; MFR: Jinlong Machinery & Electronics, Inc.; MPN: C0825B002F; TESTED: NO
VREG1 = PiB_ic_power; CREATOR: MrSwirlyEyes; DATASHEET: http://www.ti.com/lit/ds/symlink/tps768.pdf; DIST: Digikey; DISTLINK: https://www.digikey.com/products/en?keywords=296-46395-1-ND; DISTPN: 296-46395-1-ND; MFR: Texas Instruments; MPN: TPS76833QDR
VREG6 = PiB_ic_power; CREATOR: MrSwirlyEyes; DATASHEET: http://www.ti.com/lit/ds/symlink/tl1963a.pdf; DIST: Digikey; DISTLINK: https://www.digikey.com/products/en?keywords=296-24897-1-ND; DISTPN: 296-24897-1-ND; MFR: Texas Instruments; MPN: TL1963A-33DCYR
VREG7 = PiB_ic_power; CREATOR: MrSwirlyEyes; DATASHEET: http://cds.linear.com/docs/en/datasheet/1764fb.pdf; DIST: Digikey; DISTLINK: https://www.digikey.com/products/en?keywords=LT1764EQ-1.8%23PBF-ND; DISTPN: LT1764EQ-1.8#PBF-ND; MFR: Linear Technology; MPN: LT1764EQ-1.8#PBF
Y2 = PiB; DATASHEET: http://www.abracon.com/Resonators/abm3b.pdf; DIST: Digikey; DISTLINK: https://www.digikey.com/products/en?keywords=535-9122-1-ND; DISTPN: 535-9122-1-ND; MFR: Abracon LLC; MPN: ABM3B-16.000MHZ-B2-T

## Nets
1.8V: C9.1 C10.1 C13.1 C14.1 C17.1 C18.1 C21.1 C22.1 C26.1 C27.1 C39.1 C40.1 C42.1 D14.A HBRIDGE1.1 HBRIDGE2.1 HBRIDGE3.1 HBRIDGE4.1 HBRIDGE5.1 VREG7.4 VREG7.5
3.3V: C1.1 C3.1 C4.1 C5.1 C6.1 C7.1 C36.1 C41.1 C43.1 D1.K D2.K D3.K D4.K D5.K D12.K D13.A VIBE1.1 VIBE2.1 VIBE3.1 VIBE4.1 VIBE5.1 VIBE6.1 VREG6.3
A0: MCU.63
A1: DEMUX1.1 MCU.64
A2: MCU.1
A3: MCU.2
A4: MCU.3
A5: MCU.4
A6: MCU.5
A7: MCU.6
AGND: ANALOG_BR.P$2 C30.2 C31.2 C32.2 C33.2 C34.2 C47.2 C48.2 C49.2 C50.2 C51.2 C97.2 C100.2 C122.2 C134.2 C135.2 C136.2 DEMUX1.12 DEMUX1.15 MCU.58 MCU.61 R11.1 R34.1 R35.1 R36.1 R37.1 R38.1 R39.1 R42.1 R43.1 R44.1
AVCC: C30.1 C31.1 C32.1 C33.1 C34.1 C47.1 C48.1 C49.1 C50.1 C51.1 C97.1 C100.1 C122.1 C134.1 C135.1 C136.1 DEMUX1.24 FLEX1.+ FLEX2.+ FLEX3.+ FLEX4.+ FLEX5.+ FLEX6.+ FLEX7.+ FLEX8.+ FLEX9.+ FLEX10.+ L3.2 MCU.59 MCU.62
BATT_+: BATT2.+ SW1.P
C8: DEMUX1.23
C9: DEMUX1.22
C10: DEMUX1.21
C11: DEMUX1.20
C12: DEMUX1.19
C13: DEMUX1.18
GND: AVR_ISP.6 B2.5 BATT2.- C2.2 C8.2 C12.2 C16.2 C20.2 C25.2 C37.2 C38.2 C44.2 C45.2 C46.2 C98.2 C99.2 C106.2 C107.2 C108.2 C109.2 C110.2 C111.2 C112.2 C113.2 C114.2 C115.2 C116.2 C118.2 C119.2 C120.2 C123.2 C124.2 C126.2 C127.2 C132.2 JP2.GND L4.1 MCU.7 MCU.10 MCU.11 MCU.20 MCU.24 MCU.33 MCU.35 MCU.45 MCU.55 NOISE_BR.P$2 PWM_DRIVER1.1 PWM_DRIVER1.2 PWM_DRIVER1.3 PWM_DRIVER1.4 PWM_DRIVER1.5 PWM_DRIVER1.14 PWM_DRIVER1.23 PWM_DRIVER1.24 PWM_DRIVER1.25 R14.1 R16.1 R18.1 R20.1 R22.1 R24.1 R26.1 R28.1 R30.1 R32.1 R47.1 R48.1 R49.1 VREG1.1 VREG1.2
MISO: AVR_ISP.1 MCU.39
MOSI: AVR_ISP.4 MCU.38
N$1: HBRIDGE5.3 TEC5.HOT
N$2: C6.2 D4.A Q4.3 VIBE4.2
N$3: C7.2 D5.A Q5.3 VIBE5.2
N$4: C5.2 D3.A Q3.3 VIBE3.2
N$5: HBRIDGE5.2 TEC5.COLD
N$6: HBRIDGE4.2 TEC4.COLD
N$7: Q2.1 R2.2 R7.2
N$8: HBRIDGE4.5 R14.2 R15.2
N$9: Q3.1 R3.2 R8.2
N$10: HBRIDGE4.6 R16.2 R17.2
N$11: HBRIDGE4.3 TEC4.HOT
N$12: HBRIDGE3.3 TEC3.HOT
N$13: HBRIDGE3.5 R18.2 R19.2
N$14: HBRIDGE3.6 R20.2 R21.2
N$15: C4.2 D2.A Q2.3 VIBE2.2
N$16: HBRIDGE3.2 TEC3.COLD
N$17: C3.2 D1.A Q1.3 VIBE1.2
N$18: HBRIDGE2.3 TEC2.HOT
N$19: HBRIDGE2.5 R22.2 R23.2
N$20: HBRIDGE2.6 R24.2 R25.2
N$21: Q4.1 R4.2 R9.2
N$22: Q5.1 R5.2 R10.2
N$23: HBRIDGE2.2 TEC2.COLD
N$24: HBRIDGE1.3 TEC1.HOT
N$25: HBRIDGE1.5 R26.2 R27.2
N$26: HBRIDGE1.6 R28.2 R29.2
N$27: HBRIDGE1.2 TEC1.COLD
N$28: Q1.1 R1.2 R6.2
N$29: HBRIDGE5.5 R30.2 R31.2
N$30: C1.2 D12.A Q6.3 VIBE6.2
N$31: HBRIDGE5.6 R32.2 R33.2
N$32: Q6.1 R12.2 R13.2
N$44: C113.1 MCU.57 Y2.3
N$45: B2.3 MCU.9
N$46: B2.4 MCU.8
N$47: B2.2 C114.1
N$48: C112.1 MCU.56 Y2.1
N$49: A6.FEED B2.1 C115.1
N$50: C117.1 JP2.DTR
N$52: ANALOG_BR.P$1 L4.2
N$53: LED3.K R47.2
N$54: LED1.K R49.2
N$55: LED2.K R48.2
N$62: C132.1 MCU.21 MCU.22
N$63: C110.1 MCU.60
NGND: C9.2 C10.2 C13.2 C14.2 C17.2 C18.2 C21.2 C22.2 C26.2 C27.2 C36.2 C39.2 C40.2 C41.2 C42.2 C43.2 HBRIDGE1.4 HBRIDGE1.GND HBRIDGE1.P$1 HBRIDGE1.P$2 HBRIDGE2.4 HBRIDGE2.GND HBRIDGE2.P$1 HBRIDGE2.P$2 HBRIDGE3.4 HBRIDGE3.GND HBRIDGE3.P$1 HBRIDGE3.P$2 HBRIDGE4.4 HBRIDGE4.GND HBRIDGE4.P$1 HBRIDGE4.P$2 HBRIDGE5.4 HBRIDGE5.GND HBRIDGE5.P$1 HBRIDGE5.P$2 NOISE_BR.P$1 Q1.2 Q2.2 Q3.2 Q4.2 Q5.2 Q6.2 R1.1 R2.1 R3.1 R4.1 R5.1 R12.1 VREG6.2 VREG6.TAB VREG7.3 VREG7.TAB
PB4: MCU.40
PB5: MCU.41
PB6: LED2.A MCU.42
PB7: LED1.A MCU.43
PD4: DEMUX1.13 MCU.29
PD5: DEMUX1.14 MCU.30
PD6: DEMUX1.11 MCU.31
PD7: DEMUX1.10 MCU.32
PE2: MCU.48
PE3: MCU.49
PE4: MCU.50
PE5: MCU.51
PE6: MCU.52
PE7: MCU.53
PG0: MCU.14
PG1: MCU.15
PG2: MCU.16
PG3: MCU.17
PG4: MCU.18
PG5: MCU.19
RESET: AVR_ISP.5 C117.2 D11.A MCU.12 R46.1
RX0: JP2.TXO MCU.46
RX1: MCU.27
SCK: AVR_ISP.3 MCU.37
SCL: MCU.25 PWM_DRIVER1.26 R40.1
SDA: MCU.26 PWM_DRIVER1.27 R41.1
SSN: MCU.36
STRAIN_1: DEMUX1.9 FLEX2.- R34.2
STRAIN_2: DEMUX1.8 FLEX7.- R39.2
STRAIN_3: DEMUX1.7 FLEX3.- R35.2
STRAIN_4: DEMUX1.6 FLEX8.- R42.2
STRAIN_5: DEMUX1.5 FLEX4.- R36.2
STRAIN_6: DEMUX1.4 FLEX9.- R43.2
STRAIN_7: DEMUX1.3 FLEX5.- R37.2
STRAIN_8: DEMUX1.2 FLEX10.- R44.2
STRAIN_9: DEMUX1.17 FLEX1.- R11.2
STRAIN_10: DEMUX1.16 FLEX6.- R38.2
TEC_1_COLD: PWM_DRIVER1.12 R27.1
TEC_1_HOT: PWM_DRIVER1.13 R29.1
TEC_2_COLD: PWM_DRIVER1.21 R23.1
TEC_2_HOT: PWM_DRIVER1.22 R25.1
TEC_3_COLD: PWM_DRIVER1.19 R19.1
TEC_3_HOT: PWM_DRIVER1.20 R21.1
TEC_4_COLD: PWM_DRIVER1.17 R15.1
TEC_4_HOT: PWM_DRIVER1.18 R17.1
TEC_5_COLD: PWM_DRIVER1.15 R31.1
TEC_5_HOT: PWM_DRIVER1.16 R33.1
TX0: JP2.RXI MCU.47
TX1: MCU.28
VBATT: C2.1 C37.1 C38.1 C44.1 C45.1 C46.1 C118.1 C119.1 C120.1 C126.1 C127.1 D8.K D13.K D14.K LED3.A SW1.S1 VREG1.3 VREG1.4 VREG6.1 VREG7.1 VREG7.2
VCC: AVR_ISP.2 C8.1 C12.1 C16.1 C20.1 C25.1 C98.1 C99.1 C106.1 C107.1 C108.1 C109.1 C111.1 C116.1 C123.1 C124.1 D8.A D11.K HBRIDGE1.7 HBRIDGE1.8 HBRIDGE2.7 HBRIDGE2.8 HBRIDGE3.7 HBRIDGE3.8 HBRIDGE4.7 HBRIDGE4.8 HBRIDGE5.7 HBRIDGE5.8 JP2.VCC L3.1 MCU.23 MCU.34 MCU.44 MCU.54 PWM_DRIVER1.28 R40.2 R41.2 R46.2 VREG1.5 VREG1.6
VIBE_1: PWM_DRIVER1.6 R6.1
VIBE_2: PWM_DRIVER1.7 R7.1
VIBE_3: PWM_DRIVER1.8 R8.1
VIBE_4: PWM_DRIVER1.9 R9.1
VIBE_5: PWM_DRIVER1.10 R10.1
VIBE_6: PWM_DRIVER1.11 R13.1